# Altium PCB Oscilador.PcbDoc
Units mm, origin at the board's own origin, x right, y up, seen from the top; angles counter-clockwise.
Board outline 30 x 20 mm, 2 copper layers (Top Layer, Bottom Layer), stack 1.571 mm thick; 15 components, 8 nets, 31 pads, 2 vias.
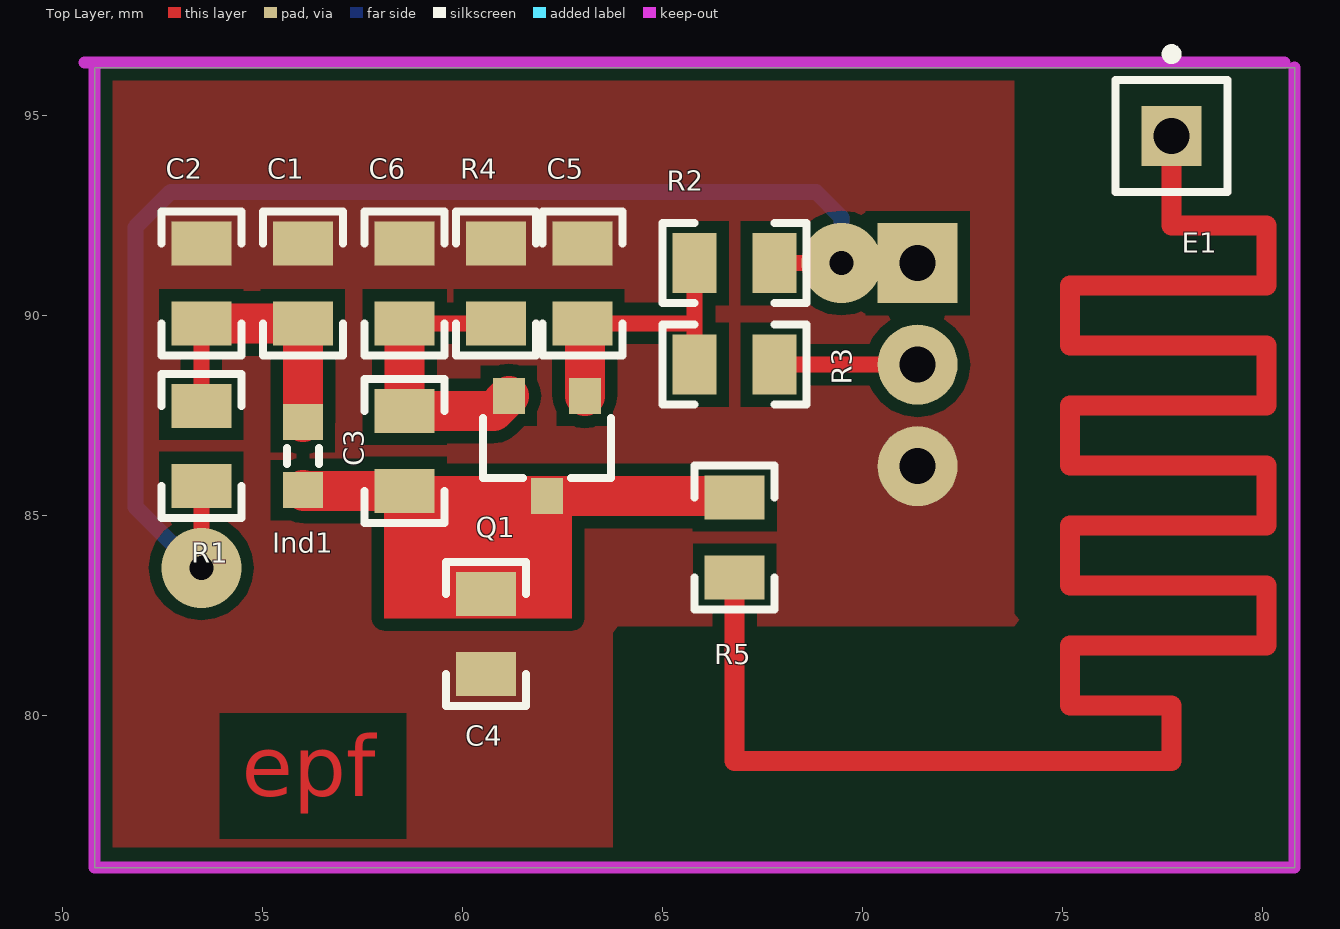
[diagram p0: Top Layer view]
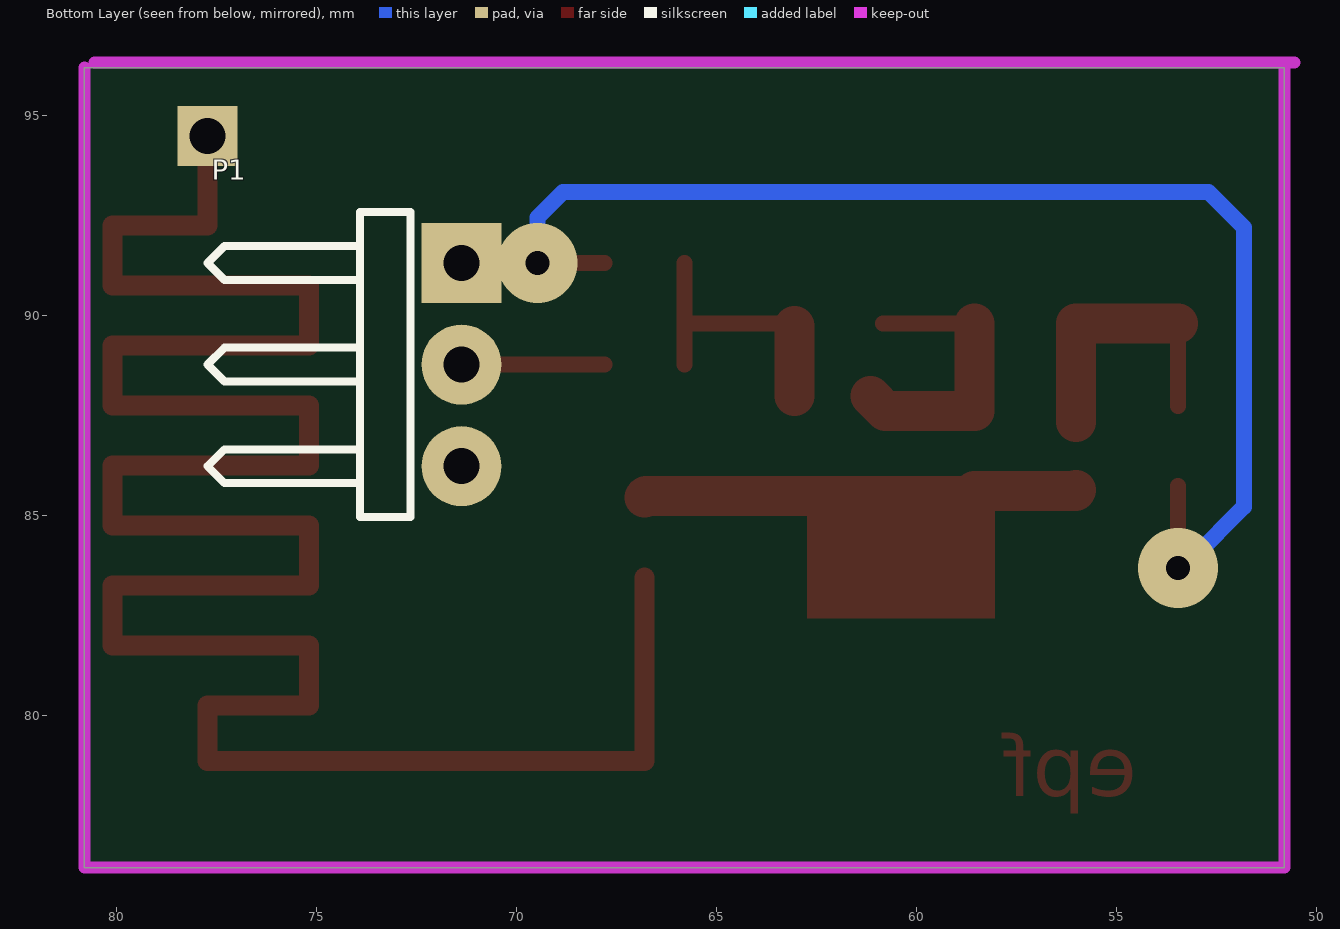
[diagram p1: Bottom Layer view, seen from below]
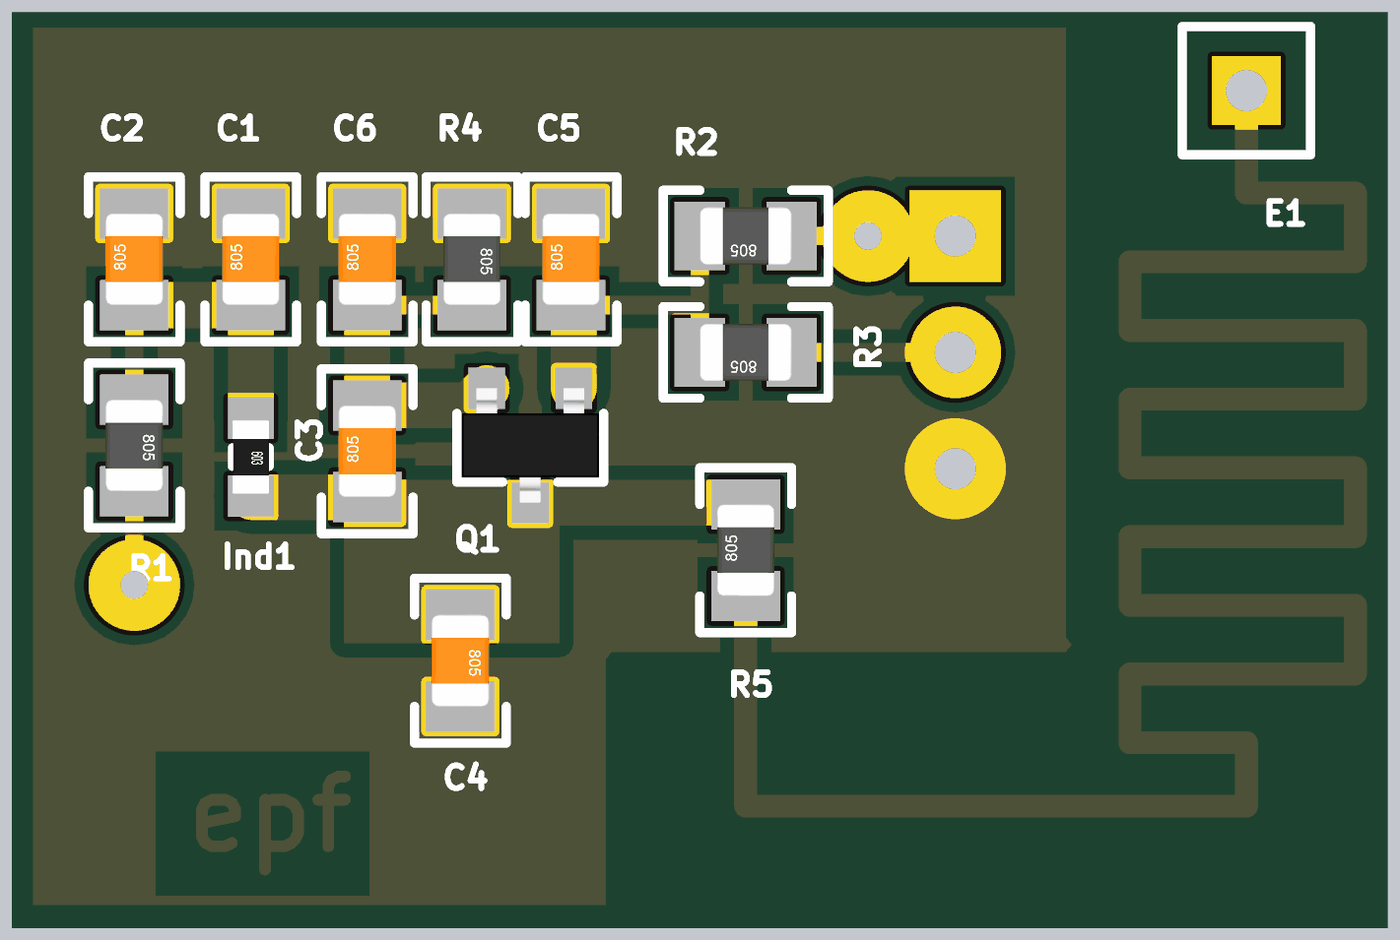
[diagram p2: 3D render of the assembled board from above, using the file's embedded part models]

## Layer stack, top to bottom
Top Layer: signal copper 0.0356
Dielectric: core 1.5, FR-4, Dk 4.8
Bottom Layer: signal copper 0.0356

## Board outline
50.8,76.2 80.8,76.2 80.8,96.2 50.8,96.2

## Design rules (kind name [scope] priority, off if disabled: settings)
Clearance [All] p1: gap=0.3
PolygonConnect [All] p1: connectstyle=Direct reliefconductorwidth=0.254 reliefentries=4 polygonreliefangle="90 Angle"
RoomDefinition Oscilador [InComponentClass('Oscilador')] p1: confinementstyle=ConfineIn formatcopy=TRUE lockcomponents=FALSE outline 50.292,75.311 85.598,75.311 85.598,96.901 50.292,96.901
RoutingVias [All] p1: holewidth=0.6 width=2 viastyle="Through Hole" minholewidth=0.5 minwidth=1.27 maxholewidth=1 maxwidth=3
SilkscreenOverComponentPads [All] p1: minsilkscreentomaskgap=0
SolderMaskExpansion [All] p1: expansion=0.102
TestPointUsage [All] p1: valid=0 allowmultiple=FALSE
Testpoint [All] p1: side=15 testpointundercomponent=TRUE minsize=1.016 maxsize=2.54 preferedsize=1.524 minholesize=0 maxholesize=1.016 preferedholesize=0.813 testpointgrid=0.025 style=1023 order=0-112345678
Width [All] p1: maxlimit=3 minlimit=0.3 preferedwidth=1
23 further rules are at their usual default settings.

## Components (designator, comment, footprint, x,y, rotation, side; value= is the part's Value field where it differs from the comment)
C1 "Capacitor" 0805_CAP 56.007,90.805 r270 top
C2 "Capacitor" 0805_CAP 53.467,90.805 r270 top
C3 "Capacitor" 0805_CAP 58.547,86.614 r270 top
C4 "Capacitor" 0805_CAP 60.579,82.042 r90 top
C5 "Capacitor" 0805_CAP 62.992,90.805 r270 top
C6 "Capacitor" 0805_CAP 58.547,90.805 r270 top
E1 "Antenna" PIN1 77.724,94.488 r0 top
Ind1 "Ind2" RES0603 56.007,86.487 r90 top
P1 "Header 3H" HDR1X3H 71.374,91.313 r270 bottom
Q1 "BFS17" SOT23 62.103,86.741 r180 top
R1 "Resistor" 0805_RES 53.467,86.741 r90 top
R2 "Resistor" 0805_RES 66.802,91.313 r180 top
R3 "Resistor" 0805_RES 66.802,88.773 r180 top
R4 "Resistor" 0805_RES 60.833,90.805 r90 top
R5 "Resistor" 0805_RES 66.802,84.455 r270 top

## Footprints (in the part's own frame and the unit in brackets; to place one, negate y for a bottom-side part, rotate by r counter-clockwise, add the part's x,y. Pads: shape width x height; smd on the part's side, far side on the other; paste and mask are expansions set on the pad)
0805_CAP [mm]
  rect 1.1x1.5 smd: 1(-1,0) 2(1,0)
  silkscreen extent -1.8,-1 1.8,1, body extent -1,-0.62 1,0.63, height 0.78
0805_RES [mm]
  rect 1.1x1.5 smd: 1(-1,0) 2(1,0)
  silkscreen extent -1.8,-1 1.8,1, body extent -1,-0.62 1,0.63, height 0.78
HDR1X3H [mm] "Connector; Header; 3 Position; Right Angle"
  rect 2x2 hole 0.9: 1(0,0)
  round 2 hole 0.9: 2(2.54,0) 3(5.08,0)
  silkscreen extent -1.27,-6.35 6.35,-1.27
PIN1 [mm] "Generic Antenna; 1 Lead"
  rect 1.5x1.5 hole 0.9: 1(0,0)
  silkscreen extent -1.4,-1.4 1.4,2.17
RES0603 [mm] "Chip Resistor, Body 1.6x0.8mm, IPC Medium Density"
  rect 0.9x1 smd: 1(-0.85,0) 2(0.85,0)
  silkscreen extent -0.2,-0.4 0.2,0.4, body extent -0.8,-0.4 0.8,0.4, height 0.3
SOT23 [mm]
  rect 0.8x0.9 smd: 1(-0.95,-1.25) 2(0.95,-1.25) 3(0,1.25)
  silkscreen extent -1.6,-0.7 1.6,0.8, body extent -1.5,-1.25 1.5,1.25, height 1.05

## Part data
C1 C2 C3 C4 C5 C6: library part Cap
E1: "Generic Antenna"
P1: "Header, 3-Pin, Right Angle"
Q1: "NPN 1 GHz Wideband Transistor"
R1 R2 R3 R4 R5: library part Res

## Via types
v1: diameter 2, hole 0.6, Top Layer to Bottom Layer, 2 vias

## Nets (pads, with @x,y where several pads share a name; then routed paths per layer and width w, separated by ;. In a path a pad name is that pad's centre, name@x,y a point inside that pad or via, vN(x,y) a via of type N, cw(c..) or ccw(c..) an arc to the next point about the centre after c; other vN are vias at no path point)
GND: C1.1 C2.1 C4.1 C5.1 C6.1 P1.3 R4.2
NetC1_2: C1.2 C2.2 Ind1.2 R1.2 | length 7.1
  Top Layer w0.4: R1.2 C2.2
  Top Layer w1: C2.2 C1.2 Ind1.2
NetC3_1: C3.1 C6.2 Q1.2 R4.1 | length 7.2
  Top Layer w0.4: C6.2 R4.1
  Top Layer w1: C6.2 C3.1 60.776,87.614 Q1.2
NetC3_2: C3.2 C4.2 Ind1.1 Q1.3 R5.1 | length 10.9
  Top Layer w1: Ind1.1 56.03,85.614 C3.2 58.67,85.491 Q1.3 66.766,85.491 R5.1
NetC5_2: C5.2 Q1.1 R2.2 R3.2 | length 7.1
  Top Layer w0.4: C5.2 C5.2@63.053,89.744 ; C5.2@63.119,89.805 65.786,89.805 65.802,89.789 ; R3.2 65.802,89.789 ; R2.2 65.802,89.789
  Top Layer w1: Q1.1 C5.2@63.053,89.744
NetE1_1: E1.1 R5.2 | length 70.5
  Top Layer w0.5: R5.2 66.802,78.867 77.724,78.867 77.724,79.502 77.724,80.252 75.184,80.252 75.184,81.752 77.724,81.752 80.1,81.752 80.1,83.252 77.724,83.252 75.184,83.252 75.184,84.752 77.724,84.752 80.1,84.752 80.1,86.252 77.724,86.252 75.184,86.252 75.184,87.752 77.724,87.752 80.1,87.752 80.1,89.252 77.724,89.252 75.184,89.252 75.184,90.752 77.724,90.752 80.1,90.752 80.1,92.252 77.724,92.252 77.724,93.752 E1.1
NetP1_2: P1.2 R3.1 | length 3.6
  Top Layer w0.4: R3.1 P1.2
VCC: P1.1 R1.1 R2.1 | length 34
  Top Layer w0.4: v1@53.467,83.947 R1.1 ; R2.1 P1.1
  Bottom Layer w0.4: v1@53.467,83.947 53.086,83.947 51.816,85.217 51.816,92.202 52.705,93.091 68.834,93.091 69.469,92.456 v1(69.469,91.313)
  other v1: 53.467,83.693

## Polygon pours and split planes (outlines as drawn)
GND on Top Layer "Top Layer-No Net" (solid, remove dead copper): 73.787,95.885 73.787,82.549 73.914,82.391 73.787,82.233 65.151,82.233 63.881,82.233 63.754,82.075 63.754,76.708 50.8,76.708 50.8,95.885

## Keep-outs
Keep-Out Layer:
  lines w0.3: 50.546,96.327 80.546,96.327 ; 50.8,96.2 50.8,76.2 80.8,76.2 80.8,96.2

## Other copper
Top Layer:
  rectangle net NetC3_2: 58.039,82.423 62.738,85.852
  text "epf" at 54.483,77.978 h1.52

## Dimensions
50.8,76.2 to 80.8,76.2 on Mechanical 1
50.8,76.2 to 50.8,96.2 on Mechanical 1